# EAGLE board lv1-recovery-analog-1 (EAGLE 3.55)
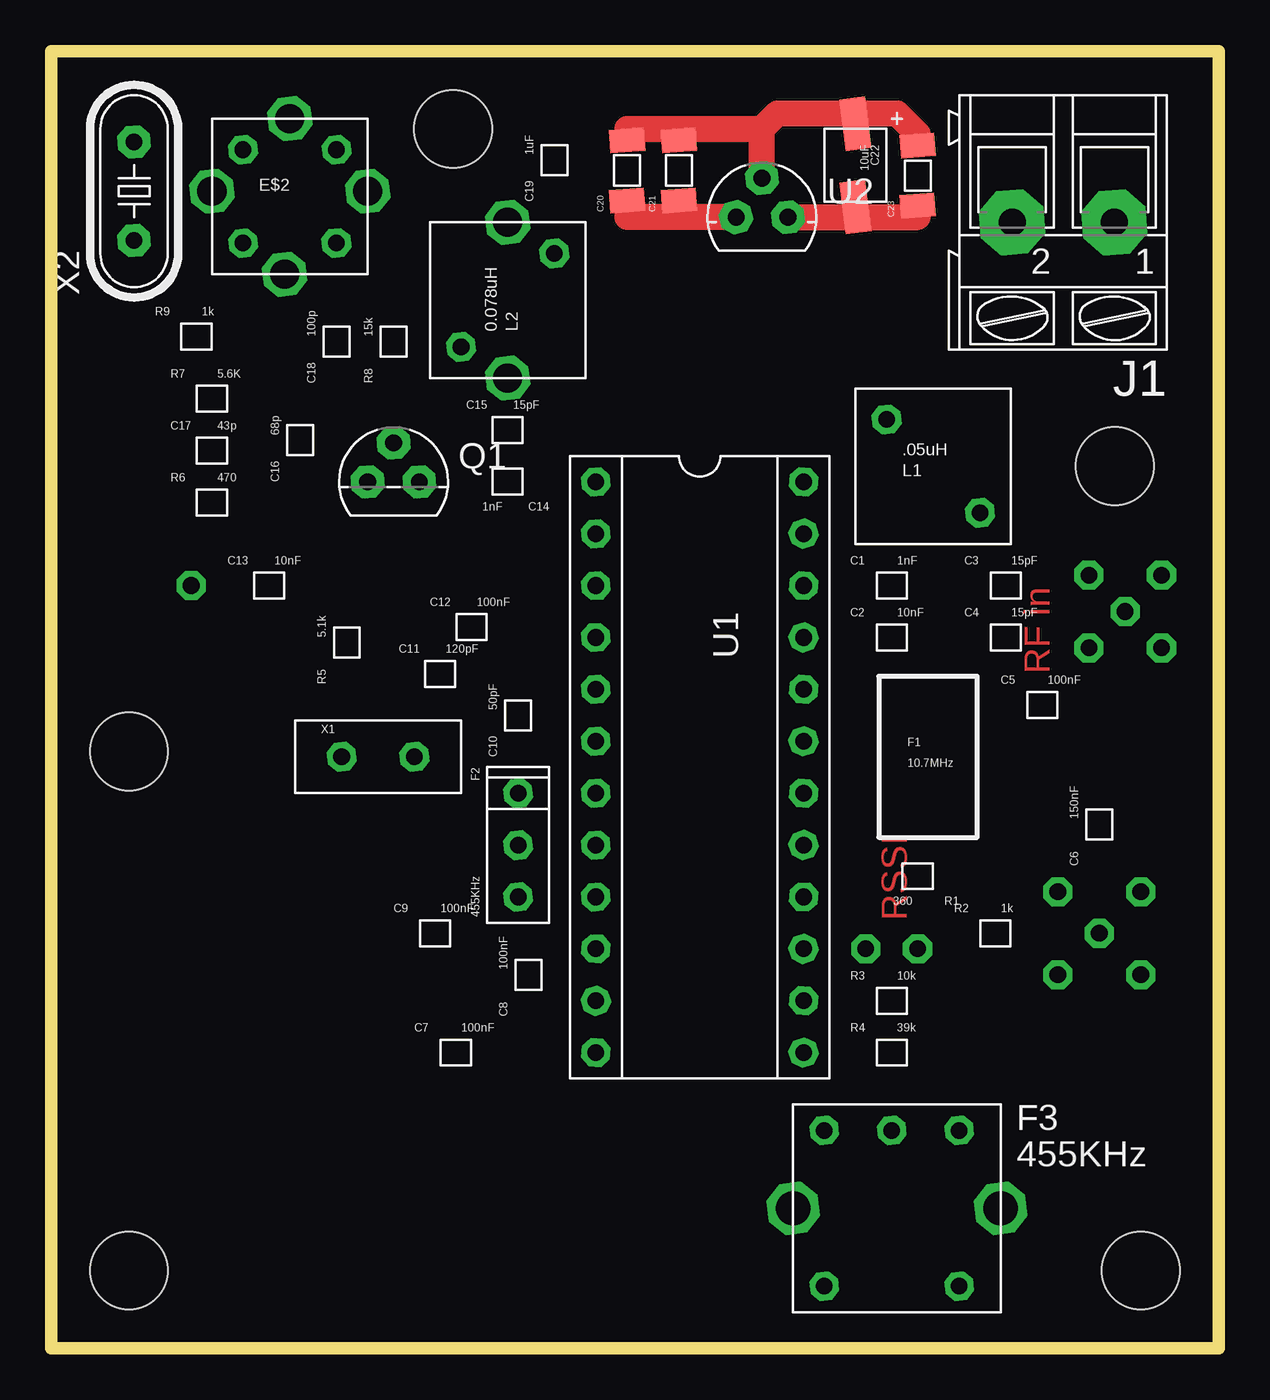
[diagram p0: board, top side]
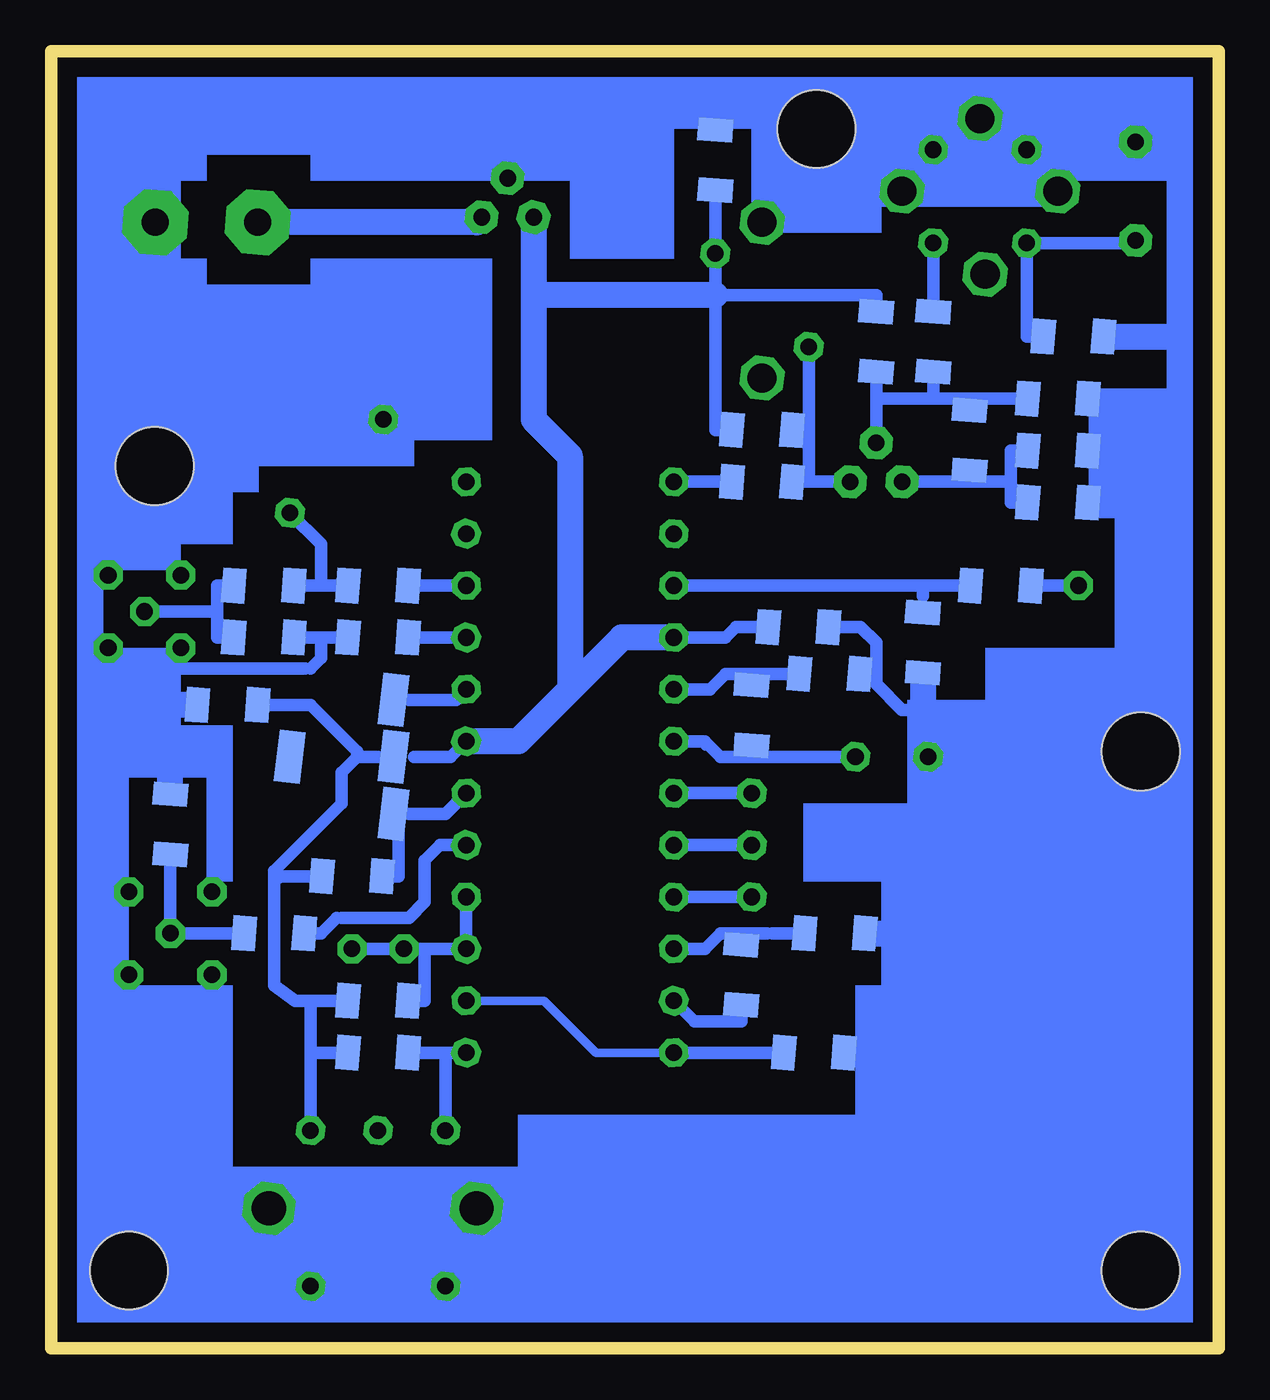
[diagram p1: board, bottom side, seen from below]

Size 57.15 x 63.5 mm. Coordinates in mm from the lower left corner, seen from the top.
Outline: 0,0 0,63.5 57.15,63.5 57.15,0 0,0
Copper layers used: Top, Bottom
Holes 3.81 mm at 3.81,3.81 53.34,3.81 52.07,43.18 3.81,29.21 19.68,59.69

## Footprints (pad centres in the part's own frame; a part is rotated, then mirrored left to right if it is on the bottom)
06B = smd 1.143 x 1.702 rotated 4.4 bottom:  1.473,0 | smd 1.143 x 1.702 rotated 4.3 bottom:  -1.473,0
06_V2 = smd 1.143 x 1.702 rotated 4.4:  1.473,0 | smd 1.143 x 1.702 rotated 4.3:  -1.473,0
A_B = smd 1.27 x 2.54 rotated 97:  -2.032,0;  2.032,0
31XX = drill 0.813 pad 1.422 octagon:  -2.286,2.286;  2.286,-2.286 | drill 0.813 pad 1.397 octagon:  2.286,2.286;  -2.286,-2.286 | drill 1.422 pad 1.93 octagon:  -3.81,0.254;  0,3.81;  3.81,0.254;  -0.254,-3.81
TFILTB = smd 2.54 x 1.27 rotated 97 bottom:  -2.54,2.54;  -2.54,-0.254;  -2.54,-3.048;  2.54,-0.254
5FILTE = drill 0.813 pad 1.422 octagon:  0,0;  2.54,0;  -2.54,0
1302 = drill 0.813 pad 1.397 octagon:  0,3.81;  -3.302,3.81;  3.302,3.81;  -3.302,-3.81;  3.302,-3.81 | drill 1.676 pad 1.93 octagon:  5.334,0;  -4.826,0
300/2 = drill 1.321 pad 3.15 octagon:  -2.515,0;  2.489,0
28XXNC = drill 0.813 pad 1.422 octagon:  -2.286,2.286;  2.286,-2.286
2803 = drill 1.422 pad 1.93 octagon:  3.81,0;  -3.81,0 | drill 0.813 pad 1.422 octagon:  -2.286,2.286;  2.286,-2.286
92 = drill 0.813 pad 1.6 octagon:  1.27,0;  0,1.905;  -1.27,0
P-24/4 = drill 0.813 pad 1.397 octagon:  -13.97,-5.08;  -11.43,-5.08;  -3.81,-5.08;  -1.27,-5.08;  -8.89,-5.08;  -6.35,-5.08;  1.27,-5.08;  3.81,-5.08;  6.35,-5.08;  8.89,-5.08;  11.43,-5.08;  13.97,-5.08;  13.97,5.08;  11.43,5.08;  8.89,5.08;  6.35,5.08;  3.81,5.08;  1.27,5.08;  -1.27,5.08;  -3.81,5.08;  -6.35,5.08;  -8.89,5.08;  -11.43,5.08;  -13.97,5.08
LXX = drill 0.813 pad 1.6 octagon:  -1.27,0;  0,1.905;  1.27,0
49V_IC = drill 0.813 pad 1.422 octagon:  -1.778,0;  1.778,0
49/S = drill 0.813 pad 1.6 octagon:  -2.413,0;  2.413,0

## Placement (x,y rotation side)
C1  1nF  [06B]  41.15,37.34 0 top
C2  10nF  [06B]  41.15,34.8 0 top
C3  15pF  [06B]  46.74,37.34 0 top
C4  15pF  [06B]  46.74,34.8 0 top
C5  100nF  [06B]  48.51,31.5 0 top
C6  150nF  [06B]  51.31,25.65 90 top
C7  100nF  [06B]  19.81,14.48 0 top
C8  100nF  [06B]  23.37,18.29 90 top
C9  100nF  [06B]  18.8,20.32 0 top
C10  50pF  [06B]  22.86,30.99 90 top
C11  120pF  [06B]  19.05,33.02 0 top
C12  100nF  [06B]  20.57,35.31 0 top
C13  10nF  [06B]  10.67,37.34 0 top
C14  1nF  [06B]  22.35,42.42 180 top
C15  15pF  [06B]  22.35,44.96 0 top
C16  68p  [06B]  12.19,44.45 90 top
C17  43p  [06B]  7.87,43.94 0 top
C18  100p  [06B]  13.97,49.28 90 top
C19  1uF  [06B]  24.64,58.17 90 top
C20  100nF  [06_V2]  28.19,57.66 90 top
C21  1uF  [06_V2]  30.73,57.66 90 top
C22  10uF  [A_B]  39.37,57.91 270 top
C23  100nF  [06_V2]  42.42,57.4 90 top
E$2  [31XX]  11.68,56.39 0 top
F1  10.7MHz  [TFILTB]  42.93,29.21 0 top
F2  455KHz  [5FILTE]  22.86,24.64 270 top
F3  455KHz  [1302]  41.15,6.86 0 top
J1  [300/2]  49.53,55.12 180 top
L1  .05uH  [28XXNC]  43.18,43.18 0 top
L2  0.078uH  [2803]  22.35,51.31 90 top
Q1  [92]  16.76,42.42 0 top
R1  360  [06B]  42.42,23.11 180 top
R2  1k  [06B]  46.23,20.32 0 top
R3  10k  [06B]  41.15,17.02 0 top
R4  39k  [06B]  41.15,14.48 0 top
R5  5.1k  [06B]  14.48,34.54 90 top
R6  470  [06B]  7.87,41.4 0 top
R7  5.6K  [06B]  7.87,46.48 0 top
R8  15k  [06B]  16.76,49.28 90 top
R9  1k  [06B]  7.11,49.53 0 top
U1  MC13135  [P-24/4]  31.75,28.45 270 top
U2  [LXX]  34.8,55.37 0 top
X1  10.245  [49V_IC]  16,28.96 0 top
X2  [49/S]  4.06,56.64 90 top

## Library data of the parts
C1-C23 F1 R1-R9 = SMD
E$2 F2 F3 L1 L2 = AESS
J1 = PTR500
Q1 = NPN
U1 = IC
U2 = V-REG
X1 X2 = QUARTZ

## Nets
S$2: U1.
S$4: U1.
S$5: U1.
S$6: U1.
S$9: U1.
S$10: U1.
S$11: L2. U1.
S$12: U1.
S$13: F3.
S$14: U1.
S$15: U1.
S$16: F2. U1.
S$17: F2. U1.
S$19: F3. U1.
S$25: F2. U1.
S$26: U1.
S$27: L2. Q1.
S$29: E$2.
S$30: U1.
S$32: U1. X1.
S$33: U1.
S$35: E$2.
S$37: Q1.
S$47: U2.
S$48: U2.
S$53: L2.

## Tracks (layer width: path | path; a pad name or v marks a point on that pad's centre or on a via)
S$1
  Bottom 0.61: 42.93,37.34 43.94,37.34 | 43.94,37.34 45.21,37.34 | 43.94,37.34 43.94,39.37 45.47,40.89
S$2
  Bottom 0.61: 36.83,37.34 39.37,37.34
S$3  (via drill 0.81 pad 1.42)
  Bottom 0.61: 48.51,37.34 49.02,37.34 49.02,36.07 | 49.02,36.07 49.02,34.8 48.51,34.8 | v52.58,36.07 49.02,36.07
S$4
  Bottom 0.61: 36.83,27.18 37.85,26.16 39.62,26.16
S$5
  Bottom 0.61: 36.83,34.8 39.62,34.8
S$6
  Bottom 0.61: 36.83,32.26 37.34,31.75 39.62,31.75
S$7
  Bottom 0.61: 40.13,25.65 40.13,23.11 40.64,23.11
S$8
  Bottom 0.61: 43.18,21.08 43.94,20.32 44.45,20.32
S$9
  Bottom 0.61: 26.67,19.56 25.15,19.56 24.38,20.32 22.1,20.32
S$10  (via drill 0.81 pad 1.42)
  Bottom 0.61: 36.83,22.1 36.83,19.56 38.86,19.56 | 38.86,19.56 v39.88,19.56 v42.42,19.56 | 39.37,17.02 38.86,17.02 38.86,19.56
S$11
  Bottom 0.61: 22.35,35.31 23.62,35.31 24.13,34.8 26.67,34.8 | 39.37,28.96 37.59,28.96 36.83,29.72 | 24.13,44.96 24.64,44.96 24.64,51.56 L2. 24.64,56.39
  Bottom 1.27: 26.67,34.8 29.21,34.8 31.75,32.26 | 31.75,32.26 34.29,29.72 36.83,29.72 | 33.53,55.12 33.53,51.56 | 33.53,51.56 33.53,45.47 31.75,43.69 31.75,32.26 | 24.64,51.56 33.53,51.56
S$12
  Bottom 0.61: 36.83,24.64 38.1,24.64 38.86,23.88 38.86,21.84 39.62,21.08 42.93,21.08
S$13
  Bottom 0.406: 44.7,17.02 44.96,17.02
  Bottom 0.61: 42.16,28.96 41.15,28.96 | 42.16,28.96 42.93,28.19 42.93,26.67 46.23,23.37 46.23,22.86 | 46.23,22.86 46.23,17.78 45.21,17.02 | 44.96,17.02 45.21,17.02 | 44.7,17.02 44.45,17.02 44.45,14.48 | 44.7,17.02 45.21,17.02 | 44.45,10.67 44.45,14.48 | 44.2,23.11 45.97,23.11 46.23,22.86 | 42.16,28.96 42.16,29.21 44.45,31.5 46.74,31.5 | 42.93,17.02 44.7,17.02 | 42.93,14.48 44.45,14.48
S$14
  Bottom 0.61: 26.67,17.02 25.65,16 23.37,16 23.37,16.51
S$15
  Bottom 0.406: 36.83,17.02 33.02,17.02 30.48,14.48 26.67,14.48
  Bottom 0.61: 21.59,14.48 26.67,14.48
S$16
  Bottom 0.61: 22.86,22.1 26.67,22.1
S$17
  Bottom 0.61: 26.67,24.64 22.86,24.64
S$18  (via drill 0.81 pad 1.42)
  Bottom 0.61: 48.01,20.32 v51.31,20.32 51.31,23.88
S$19
  Bottom 0.61: 36.83,14.48 37.85,14.48 | 37.85,14.48 39.37,14.48 | 37.85,14.48 37.85,10.67
S$20  (via drill 0.81 pad 1.42)
  other vias: 49.28,22.35
S$21  (via drill 0.81 pad 1.42)
  other vias: 53.34,22.35
S$22  (via drill 0.81 pad 1.42)
  other vias: 53.34,18.29
S$23  (via drill 0.81 pad 1.42)
  other vias: 49.28,18.29
S$24
  Bottom 0.406: 21.84,20.32 21.59,20.32
  Bottom 0.61: 20.57,20.32 21.84,20.32
S$25
  Bottom 0.61: F2. 26.67,27.18
S$26
  Bottom 0.61: 24.13,42.42 26.67,42.42
S$27
  Bottom 0.61: 18.03,42.42 20.07,42.42 | 20.57,42.42 20.07,42.42 | 20.07,42.42 20.07,44.96 | 20.07,44.96 20.32,44.96 | 20.07,49.02 20.07,44.96
S$28
  Bottom 1.27: 50.29,31.5 51.05,31.5
S$29
  Bottom 0.61: 13.97,54.1 13.97,51.05
S$30
  Bottom 0.61: 21.08,33.02 24.13,33.02 24.89,32.26 26.67,32.26
S$31
  Bottom 0.406: 25.15,29.46 25.15,29.72
S$32
  Bottom 0.61: 26.67,29.72 25.15,29.72 24.38,28.96 X1.
S$33
  Bottom 0.61: 14.48,37.34 26.67,37.34 | 12.19,37.34 14.48,37.34 | 14.48,37.34 14.48,36.83
S$34  (via drill 0.81 pad 1.42)
  Bottom 0.61: v6.86,37.34 8.89,37.34
S$35
  Bottom 0.61: 4.06,54.1 9.4,54.1 9.4,49.53 8.89,49.53
S$36
  Top 1.27: 28.19,59.69 34.8,59.69 | 34.8,59.69 35.56,60.45 41.4,60.45 42.42,59.44 | 34.8,57.15 34.8,59.69
S$37
  Bottom 0.61: 12.19,42.42 Q1. | 12.19,42.42 12.19,42.67 | 9.65,43.94 10.16,43.94 10.16,42.42 | 10.16,42.42 12.19,42.42 | 9.65,41.4 10.16,41.4 10.16,42.42
S$38
  Bottom 0.61: 16.76,45.97 16.76,46.23 | 16.76,45.97 16.76,44.2 | 16.76,46.48 16.76,45.97 | 16.76,46.48 16.76,47.5 | 12.19,46.48 12.19,46.23 | 12.19,46.48 13.97,46.48 | 13.97,46.48 16.76,46.48 | 12.19,46.48 9.65,46.48 | 12.19,45.97 12.19,46.48 | 13.97,47.5 13.97,46.48
S$39
  Bottom 0.61: 16.76,51.05 16.76,51.56 24.38,51.56
S$40
  Bottom 1.27: 36.32,55.12 46.99,55.12
S$41  (via drill 0.81 pad 1.42)
  other vias: 54.36,34.29
S$42
  Bottom 0.61: 18.8,35.31 17.53,35.31 16.76,34.54 16.76,32.51 15.49,31.24 14.48,31.24
S$43  (via drill 0.81 pad 1.42)
  other vias: 54.36,37.85
S$44  (via drill 0.81 pad 1.42)
  other vias: 50.8,34.29
S$45  (via drill 0.81 pad 1.42)
  other vias: 50.8,37.85
S$47
  Top 0.813: 28.19,55.37 28.19,55.88
  Top 1.27: 33.53,55.37 28.19,55.37
S$48
  Top 1.27: U2. 42.42,55.37
S$49
  Bottom 1.27: 51.31,27.43 51.31,28.19
S$50
  Bottom 1.27: 17.02,20.32 16,20.32
S$51
  Bottom 1.27: 14.48,32.77 14.48,31.5
S$52
  Bottom 0.61: 44.7,33.27 50.8,33.27
S$53
  Bottom 1.27: 22.35,55.12 20.83,56.64
S$54
  Bottom 1.27: 5.33,49.53 2.03,49.53
S$55
  Bottom 1.27: 4.06,59.18 4.06,60.2
S$56
  Bottom 0.61: 43.94,34.8 44.96,34.8 | 43.94,34.8 43.94,33.78 44.45,33.27 | 42.93,34.8 43.94,34.8
(copper drawn outside any net)
  shapes: Bottom area x46

## Text on the board
Top: RF in | RSSI